# Allegro board AT606IO_VB1.brd
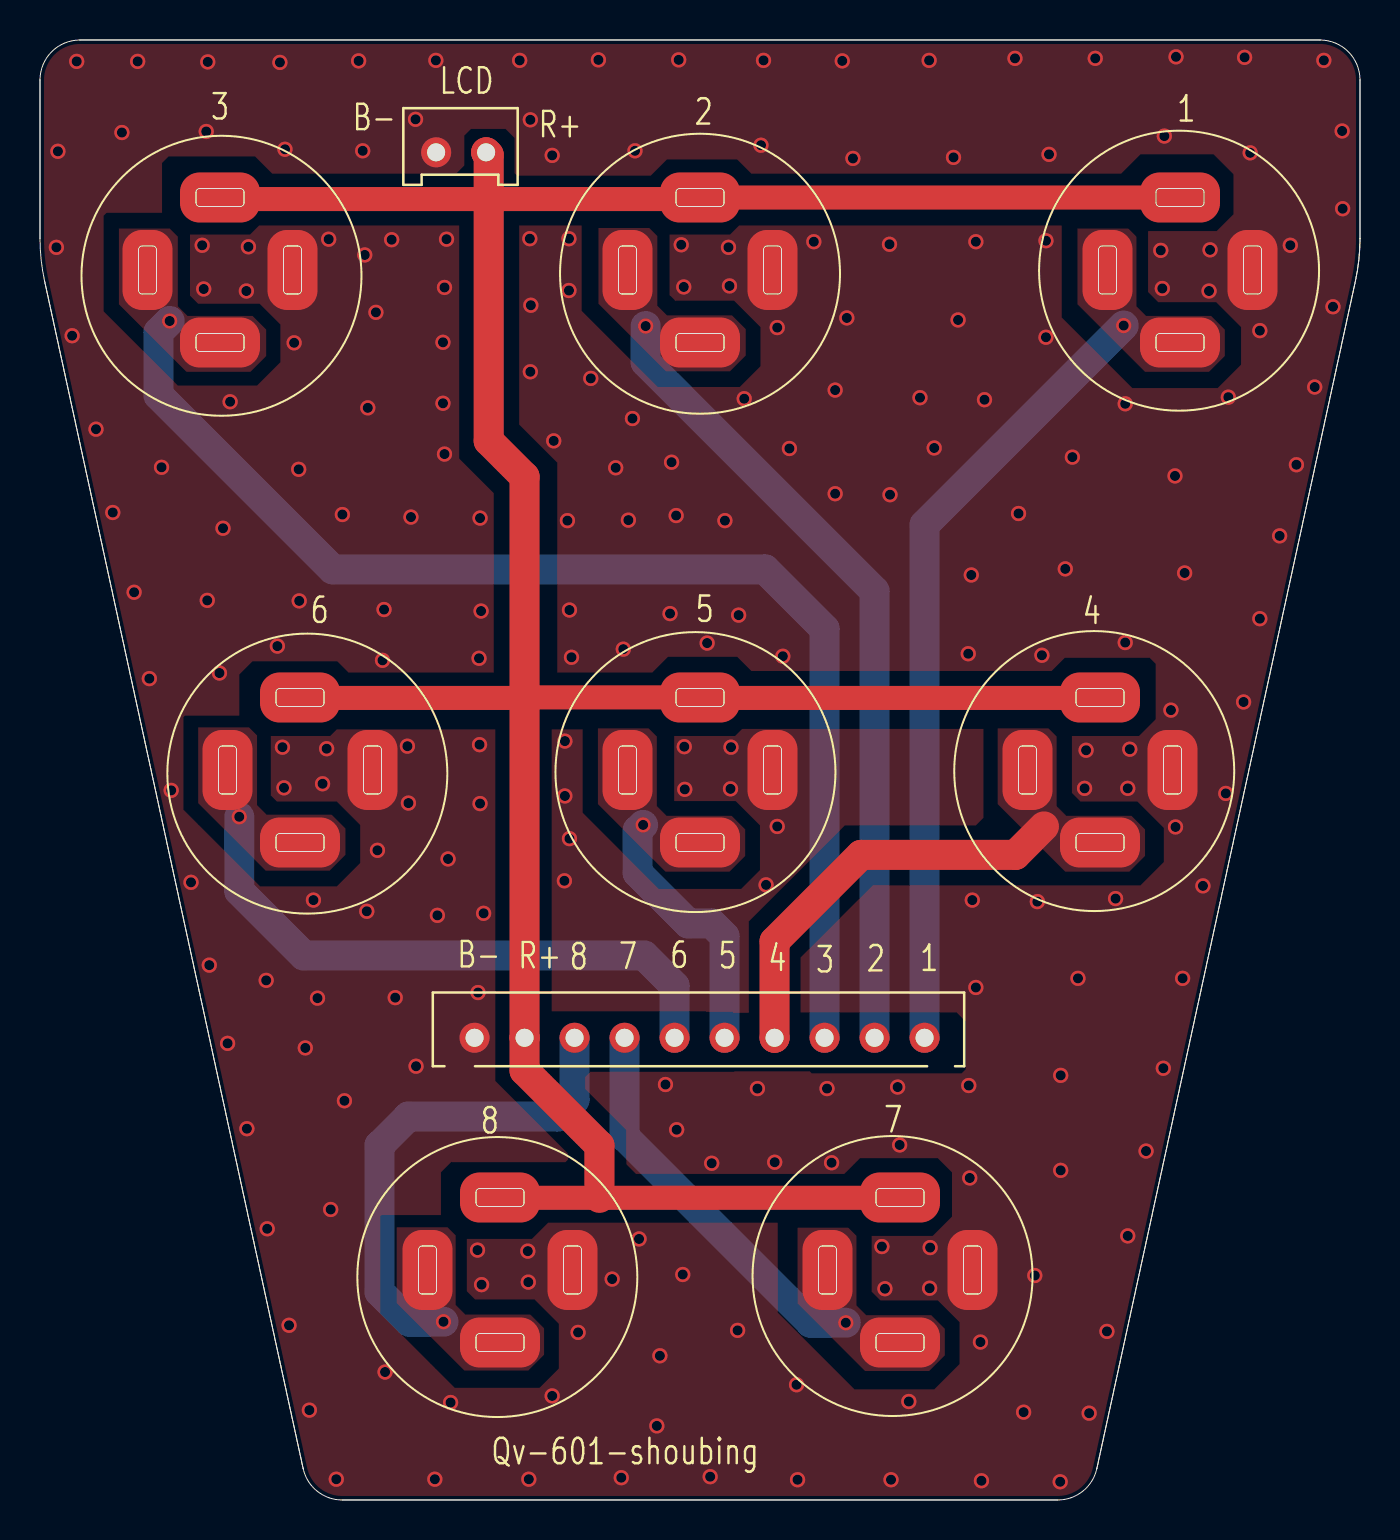
[diagram p0: board, top side]
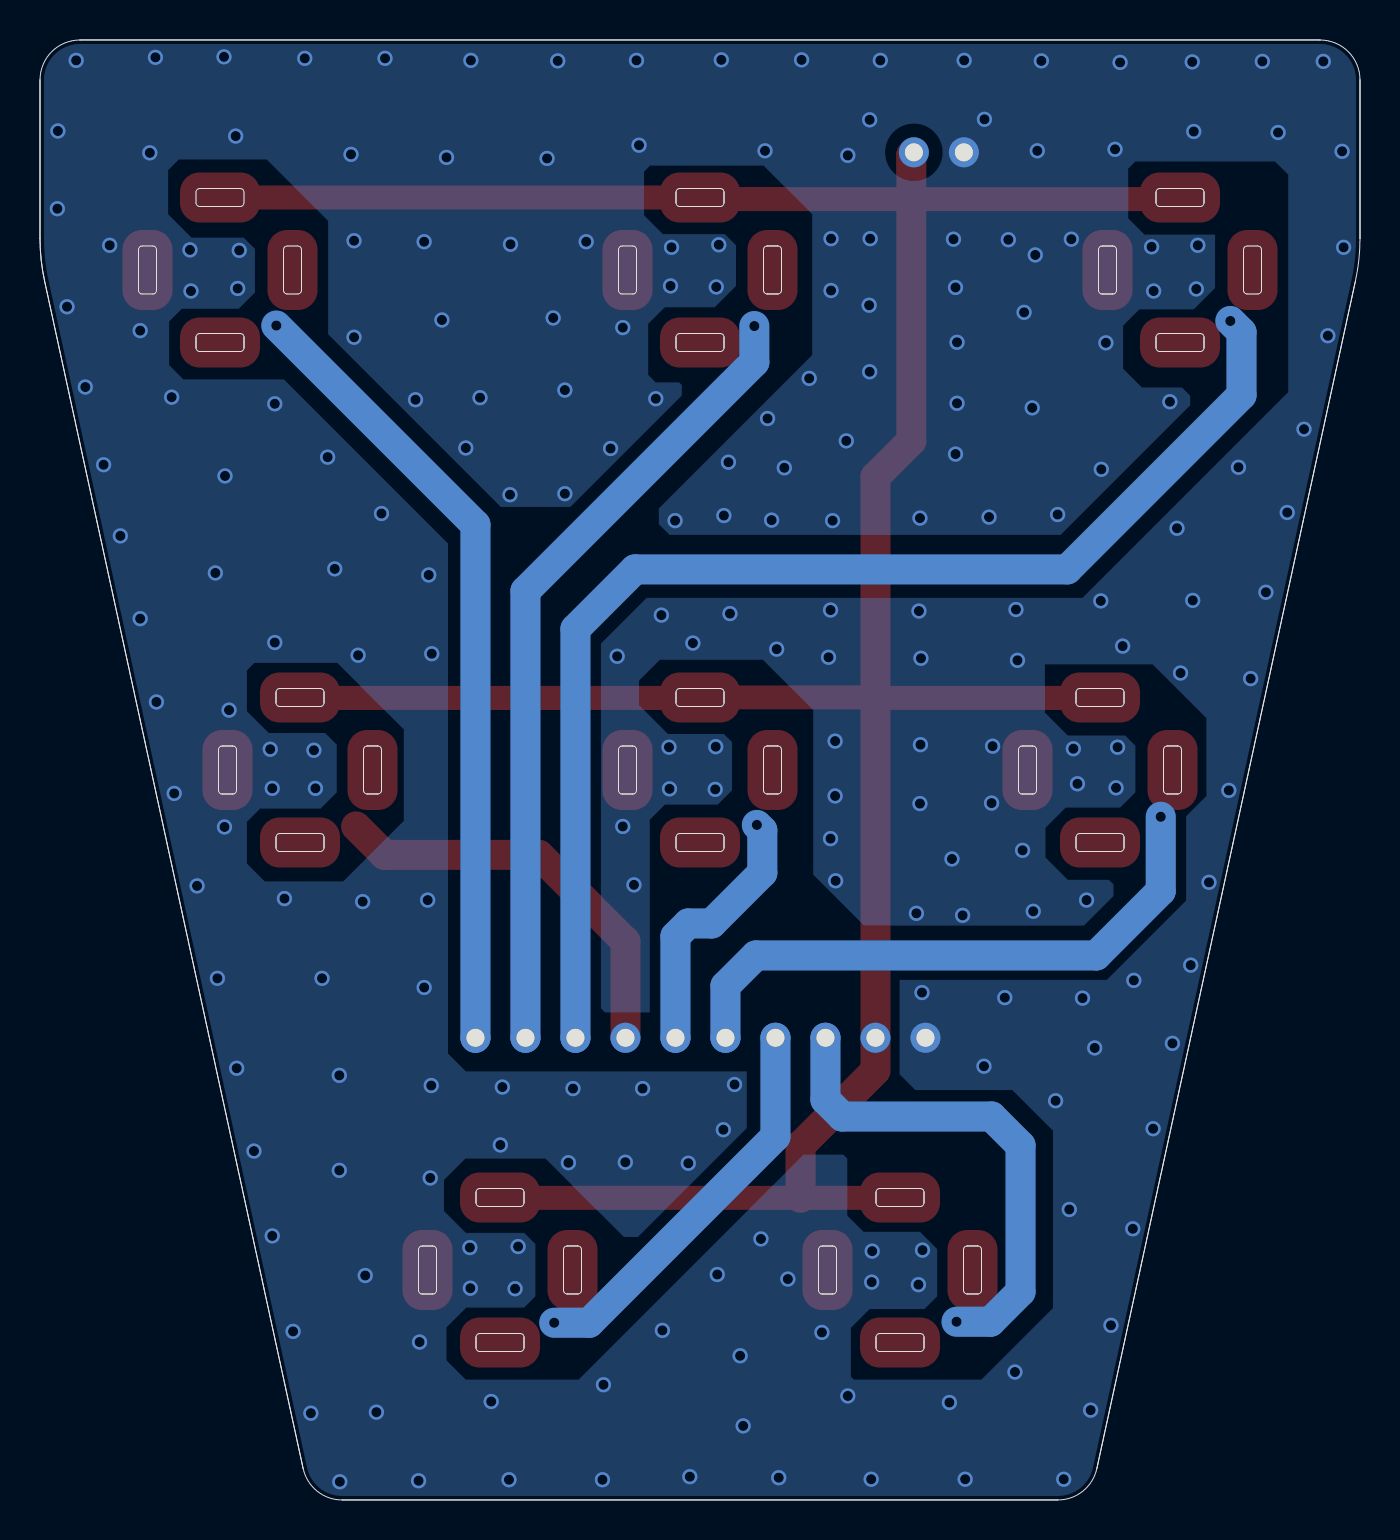
[diagram p1: board, bottom side, seen from below]

Outline 66 x 73 mm; copper layers: TOP, BOTTOM. Coordinates in mm from the lower left corner of the outline.
Outline path: 0,71 0,63.08 ; 0,71 arc(0.59,72.41) 2,73 ; 0,71 0,63.08 ; 0,63.08 arc(0.06,62.01) 0.23,60.95 ; 2,73 64,73 ; 2,73 64,73 ; 0.23,60.95 13.16,1.57 ; 0.23,60.95 13.16,1.57 ; 13.16,1.57 arc(13.86,0.44) 15.11,0 ; 64,73 arc(65.41,72.41) 66,71 ; 7.8,65.39 7.8,64.86 ; 7.8,65.39 arc(7.85,65.52) 7.98,65.58 ; 7.8,65.39 7.8,64.86 ; 7.8,64.86 arc(7.85,64.73) 7.98,64.68 ; 7.98,65.58 10.02,65.58 ; 7.98,65.58 10.02,65.58 ; 7.8,58.14 7.8,57.61 ; 7.8,58.14 arc(7.85,58.27) 7.98,58.33 ; 7.8,58.14 7.8,57.61 ; 7.8,57.61 arc(7.85,57.48) 7.98,57.43 ; 7.98,58.33 10.02,58.33 ; 7.98,58.33 10.02,58.33 ; 10.02,65.58 arc(10.15,65.52) 10.2,65.39 ; 7.98,64.68 10.02,64.68 ; 7.98,64.68 10.02,64.68 ; 10.02,64.68 arc(10.15,64.73) 10.2,64.86 ; 10.02,58.33 arc(10.15,58.27) 10.2,58.14 ; 7.98,57.43 10.02,57.43 ; 7.98,57.43 10.02,57.43 ; 10.02,57.43 arc(10.15,57.48) 10.2,57.61 ; 8.93,37.52 8.93,35.48 ; 8.93,37.52 arc(8.98,37.65) 9.11,37.7 ; 8.93,37.52 8.93,35.48 ; 8.93,35.48 arc(8.98,35.35) 9.11,35.3 ; 9.11,37.7 9.64,37.7 ; 9.11,37.7 9.64,37.7 ; 9.64,37.7 arc(9.77,37.65) 9.83,37.52 ; 9.11,35.3 9.64,35.3 ; 9.11,35.3 9.64,35.3 ; 9.64,35.3 arc(9.77,35.35) 9.83,35.48 ; 9.83,37.52 9.83,35.48 ; 9.83,37.52 9.83,35.48 ; 10.2,65.39 10.2,64.86 ; 10.2,65.39 10.2,64.86 ; 10.2,58.14 10.2,57.61 ; 10.2,58.14 10.2,57.61 ; 11.8,40.39 11.8,39.86 ; 11.8,40.39 arc(11.85,40.52) 11.98,40.58 ; 11.8,40.39 11.8,39.86 ; 11.8,39.86 arc(11.85,39.73) 11.98,39.68 ; 11.98,40.58 14.02,40.58 ; 11.98,40.58 14.02,40.58 ; 11.8,33.14 11.8,32.61 ; 11.8,33.14 arc(11.85,33.27) 11.98,33.33 ; 11.8,33.14 11.8,32.61 ; 11.8,32.61 arc(11.85,32.48) 11.98,32.43 ; 11.98,33.33 14.02,33.33 ; 11.98,33.33 14.02,33.33 ; 14.02,40.58 arc(14.15,40.52) 14.2,40.39 ; 11.98,39.68 14.02,39.68 ; 11.98,39.68 14.02,39.68 ; 14.02,39.68 arc(14.15,39.73) 14.2,39.86 ; 14.02,33.33 arc(14.15,33.27) 14.2,33.14 ; 11.98,32.43 14.02,32.43 ; 11.98,32.43 14.02,32.43 ; 14.02,32.43 arc(14.15,32.48) 14.2,32.61 ; 12.18,62.52 12.18,60.48 ; 12.18,62.52 arc(12.23,62.65) 12.36,62.7 ; 12.18,62.52 12.18,60.48 ; 12.18,60.48 arc(12.23,60.35) 12.36,60.3 ; 12.36,62.7 12.89,62.7 ; 12.36,62.7 12.89,62.7 ; 12.89,62.7 arc(13.02,62.65) 13.08,62.52 ; 12.36,60.3 12.89,60.3 ; 12.36,60.3 12.89,60.3 ; 12.89,60.3 arc(13.02,60.35) 13.08,60.48 ; 13.08,62.52 13.08,60.48 ; 13.08,62.52 13.08,60.48 ; 14.2,40.39 14.2,39.86 ; 14.2,40.39 14.2,39.86 ; 14.2,33.14 14.2,32.61 ; 14.2,33.14 14.2,32.61 ; 15.11,0 50.89,0 ; 15.11,0 50.89,0 ; 50.89,0 arc(52.14,0.44) 52.84,1.57 ; 16.18,37.52 16.18,35.48 ; 16.18,37.52 arc(16.23,37.65) 16.36,37.7 ; 16.18,37.52 16.18,35.48 ; 16.18,35.48 arc(16.23,35.35) 16.36,35.3 ; 16.36,37.7 16.89,37.7 ; 16.36,37.7 16.89,37.7 ; 16.89,37.7 arc(17.02,37.65) 17.08,37.52 ; 16.36,35.3 16.89,35.3 ; 16.36,35.3 16.89,35.3 ; 16.89,35.3 arc(17.02,35.35) 17.08,35.48 ; 17.08,37.52 17.08,35.48 ; 17.08,37.52 17.08,35.48 ; 18.93,12.52 18.93,10.48 ; 18.93,12.52 arc(18.98,12.65) 19.11,12.7 ; 18.93,12.52 18.93,10.48 ; 18.93,10.48 arc(18.98,10.35) 19.11,10.3 ; 19.11,12.7 19.64,12.7 ; 19.11,12.7 19.64,12.7 ; 19.64,12.7 arc(19.77,12.65) 19.83,12.52 ; 19.11,10.3 19.64,10.3 ; 19.11,10.3 19.64,10.3 ; 19.64,10.3 arc(19.77,10.35) 19.83,10.48 ; 19.83,12.52 19.83,10.48 ; 19.83,12.52 19.83,10.48 ; 21.8,15.39 21.8,14.86 ; 21.8,15.39 arc(21.85,15.52) 21.98,15.58 ; 21.8,15.39 21.8,14.86 ; 21.8,14.86 arc(21.85,14.73) 21.98,14.68 ; 21.98,15.58 24.02,15.58 ; 21.98,15.58 24.02,15.58 ; 21.8,8.14 21.8,7.61 ; 21.8,8.14 arc(21.85,8.27) 21.98,8.33 ; 21.8,8.14 21.8,7.61 ; 21.8,7.61 arc(21.85,7.48) 21.98,7.43 ; 21.98,8.33 24.02,8.33 ; 21.98,8.33 24.02,8.33 ; 24.02,15.58 arc(24.15,15.52) 24.2,15.39 ; 21.98,14.68 24.02,14.68 ; 21.98,14.68 24.02,14.68 ; 24.02,14.68 arc(24.15,14.73) 24.2,14.86 ; 24.02,8.33 arc(24.15,8.27) 24.2,8.14 ; 21.98,7.43 24.02,7.43 ; 21.98,7.43 24.02,7.43 ; 24.02,7.43 arc(24.15,7.48) 24.2,7.61 ; 24.2,15.39 24.2,14.86 ; 24.2,15.39 24.2,14.86 ; 24.2,8.14 24.2,7.61 ; 24.2,8.14 24.2,7.61 ; 26.18,12.52 26.18,10.48 ; 26.18,12.52 arc(26.23,12.65) 26.36,12.7 ; 26.18,12.52 26.18,10.48 ; 26.18,10.48 arc(26.23,10.35) 26.36,10.3 ; 26.36,12.7 26.89,12.7 ; 26.36,12.7 26.89,12.7 ; 26.89,12.7 arc(27.02,12.65) 27.08,12.52 ; 26.36,10.3 26.89,10.3 ; 26.36,10.3 26.89,10.3 ; 26.89,10.3 arc(27.02,10.35) 27.08,10.48 ; 27.08,12.52 27.08,10.48 ; 27.08,12.52 27.08,10.48 ; 28.93,62.52 28.93,60.48 ; 28.93,62.52 arc(28.98,62.65) 29.11,62.7 ; 28.93,62.52 28.93,60.48 ; 28.93,60.48 arc(28.98,60.35) 29.11,60.3 ; 29.11,62.7 29.64,62.7 ; 29.11,62.7 29.64,62.7 ; 28.93,37.52 28.93,35.48 ; 28.93,37.52 arc(28.98,37.65) 29.11,37.7 ; 28.93,37.52 28.93,35.48 ; 28.93,35.48 arc(28.98,35.35) 29.11,35.3 ; 29.11,37.7 29.64,37.7 ; 29.11,37.7 29.64,37.7 ; 29.64,62.7 arc(29.77,62.65) 29.83,62.52 ; 29.11,60.3 29.64,60.3 ; 29.11,60.3 29.64,60.3 ; 29.64,60.3 arc(29.77,60.35) 29.83,60.48 ; 29.64,37.7 arc(29.77,37.65) 29.83,37.52 ; 29.11,35.3 29.64,35.3 ; 29.11,35.3 29.64,35.3 ; 29.64,35.3 arc(29.77,35.35) 29.83,35.48 ; 29.83,62.52 29.83,60.48 ; 29.83,62.52 29.83,60.48 ; 29.83,37.52 29.83,35.48 ; 29.83,37.52 29.83,35.48 ; 31.8,65.39 31.8,64.86 ; 31.8,65.39 arc(31.85,65.52) 31.98,65.58 ; 31.8,65.39 31.8,64.86 ; 31.8,64.86 arc(31.85,64.73) 31.98,64.68 ; 31.98,65.58 34.02,65.58 ; 31.98,65.58 34.02,65.58 ; 31.8,58.14 31.8,57.61 ; 31.8,58.14 arc(31.85,58.27) 31.98,58.33 ; 31.8,58.14 31.8,57.61 ; 31.8,57.61 arc(31.85,57.48) 31.98,57.43 ; 31.98,58.33 34.02,58.33 ; 31.98,58.33 34.02,58.33 ; 31.8,40.39 31.8,39.86 ; 31.8,40.39 arc(31.85,40.52) 31.98,40.58 ; 31.8,40.39 31.8,39.86 ; 31.8,39.86 arc(31.85,39.73) 31.98,39.68 ; 31.98,40.58 34.02,40.58 ; 31.98,40.58 34.02,40.58 ; 31.8,33.14 31.8,32.61 ; 31.8,33.14 arc(31.85,33.27) 31.98,33.33 ; 31.8,33.14 31.8,32.61 ; 31.8,32.61 arc(31.85,32.48) 31.98,32.43 ; 31.98,33.33 34.02,33.33 ; 31.98,33.33 34.02,33.33 ; 34.02,65.58 arc(34.15,65.52) 34.2,65.39 ; 31.98,64.68 34.02,64.68 ; 31.98,64.68 34.02,64.68 ; 34.02,64.68 arc(34.15,64.73) 34.2,64.86 ; 34.02,58.33 arc(34.15,58.27) 34.2,58.14 ; 31.98,57.43 34.02,57.43 ; 31.98,57.43 34.02,57.43 ; 34.02,57.43 arc(34.15,57.48) 34.2,57.61 ; 34.02,40.58 arc(34.15,40.52) 34.2,40.39 ; 31.98,39.68 34.02,39.68 ; 31.98,39.68 34.02,39.68 ; 34.02,39.68 arc(34.15,39.73) 34.2,39.86 ; 34.02,33.33 arc(34.15,33.27) 34.2,33.14 ; 31.98,32.43 34.02,32.43 ; 31.98,32.43 34.02,32.43 ; 34.02,32.43 arc(34.15,32.48) 34.2,32.61 ; 34.2,65.39 34.2,64.86 ; 34.2,65.39 34.2,64.86 ; 34.2,58.14 34.2,57.61 ; 34.2,58.14 34.2,57.61 ; 34.2,40.39 34.2,39.86 ; 34.2,40.39 34.2,39.86 ; 34.2,33.14 34.2,32.61 ; 34.2,33.14 34.2,32.61 ; 36.18,37.52 36.18,35.48 ; 36.18,37.52 arc(36.23,37.65) 36.36,37.7 ; 36.18,37.52 36.18,35.48 ; 36.18,35.48 arc(36.23,35.35) 36.36,35.3 ; 36.36,37.7 36.89,37.7 ; 36.36,37.7 36.89,37.7 ; 36.89,37.7 arc(37.02,37.65) 37.08,37.52 ; 36.36,35.3 36.89,35.3 ; 36.36,35.3 36.89,35.3 ; 36.89,35.3 arc(37.02,35.35) 37.08,35.48 ; 37.08,37.52 37.08,35.48 ; 37.08,37.52 37.08,35.48 ; 38.93,12.52 38.93,10.48 ; 38.93,12.52 arc(38.98,12.65) 39.11,12.7 ; 38.93,12.52 38.93,10.48 ; 38.93,10.48 arc(38.98,10.35) 39.11,10.3 ; 39.11,12.7 39.64,12.7 ; 39.11,12.7 39.64,12.7 ; 39.64,12.7 arc(39.77,12.65) 39.83,12.52 ; 39.11,10.3 39.64,10.3 ; 39.11,10.3 39.64,10.3 ; 39.64,10.3 arc(39.77,10.35) 39.83,10.48 ; 39.83,12.52 39.83,10.48 ; 39.83,12.52 39.83,10.48 ; 41.8,15.39 41.8,14.86 ; 41.8,15.39 arc(41.85,15.52) 41.98,15.58 ; 41.8,15.39 41.8,14.86 ; 41.8,14.86 arc(41.85,14.73) 41.98,14.68 ; 41.98,15.58 44.02,15.58 ; 41.98,15.58 44.02,15.58 ; 41.8,8.14 41.8,7.61 ; 41.8,8.14 arc(41.85,8.27) 41.98,8.33 ; 41.8,8.14 41.8,7.61 ; 41.8,7.61 arc(41.85,7.48) 41.98,7.43 ; 41.98,8.33 44.02,8.33 ; 41.98,8.33 44.02,8.33 ; 44.02,15.58 arc(44.15,15.52) 44.2,15.39 ; 41.98,14.68 44.02,14.68 ; 41.98,14.68 44.02,14.68 ; 44.02,14.68 arc(44.15,14.73) 44.2,14.86 ; 44.02,8.33 arc(44.15,8.27) 44.2,8.14 ; 41.98,7.43 44.02,7.43 ; 41.98,7.43 44.02,7.43 ; 44.02,7.43 arc(44.15,7.48) 44.2,7.61 ; 44.2,15.39 44.2,14.86 ; 44.2,15.39 44.2,14.86 ; 44.2,8.14 44.2,7.61 ; 44.2,8.14 44.2,7.61 ; 46.18,12.52 46.18,10.48 ; 46.18,12.52 arc(46.23,12.65) 46.36,12.7 ; 46.18,12.52 46.18,10.48 ; 46.18,10.48 arc(46.23,10.35) 46.36,10.3 ; 46.36,12.7 46.89,12.7 ; 46.36,12.7 46.89,12.7 ; 46.89,12.7 arc(47.02,12.65) 47.08,12.52 ; 46.36,10.3 46.89,10.3 ; 46.36,10.3 46.89,10.3 ; 46.89,10.3 arc(47.02,10.35) 47.08,10.48 ; 47.08,12.52 47.08,10.48 ; 47.08,12.52 47.08,10.48 ; 48.93,37.52 48.93,35.48 ; 48.93,37.52 arc(48.98,37.65) 49.11,37.7 ; 48.93,37.52 48.93,35.48 ; 48.93,35.48 arc(48.98,35.35) 49.11,35.3 ; 49.11,37.7 49.64,37.7 ; 49.11,37.7 49.64,37.7 ; 49.64,37.7 arc(49.77,37.65) 49.83,37.52 ; 49.11,35.3 49.64,35.3 ; 49.11,35.3 49.64,35.3 ; 49.64,35.3 arc(49.77,35.35) 49.83,35.48 ; 49.83,37.52 49.83,35.48 ; 49.83,37.52 49.83,35.48 ; 51.8,40.39 51.8,39.86 ; 51.8,40.39 arc(51.85,40.52) 51.98,40.58 ; 51.8,40.39 51.8,39.86 ; 51.8,39.86 arc(51.85,39.73) 51.98,39.68 ; 51.98,40.58 54.02,40.58 ; 51.98,40.58 54.02,40.58 ; 51.8,33.14 51.8,32.61 ; 51.8,33.14 arc(51.85,33.27) 51.98,33.33 ; 51.8,33.14 51.8,32.61 ; 51.8,32.61 arc(51.85,32.48) 51.98,32.43 ; 51.98,33.33 54.02,33.33 ; 51.98,33.33 54.02,33.33 ; 54.02,40.58 arc(54.15,40.52) 54.2,40.39 ; 51.98,39.68 54.02,39.68 ; 51.98,39.68 54.02,39.68 ; 54.02,39.68 arc(54.15,39.73) 54.2,39.86 ; 54.02,33.33 arc(54.15,33.27) 54.2,33.14 ; 51.98,32.43 54.02,32.43 ; 51.98,32.43 54.02,32.43 ; 54.02,32.43 arc(54.15,32.48) 54.2,32.61 ; 52.84,1.57 65.77,60.95 ; 52.84,1.57 65.77,60.95 ; 65.77,60.95 arc(65.94,62.01) 66,63.08 ; 65.77,60.95 arc(65.94,62.01) 66,63.08 ; 54.2,40.39 54.2,39.86 ; 54.2,40.39 54.2,39.86 ; 54.2,33.14 54.2,32.61 ; 54.2,33.14 54.2,32.61 ; 55.8,58.14 55.8,57.61 ; 55.8,58.14 arc(55.85,58.27) 55.98,58.33 ; 55.8,58.14 55.8,57.61 ; 55.8,57.61 arc(55.85,57.48) 55.98,57.43 ; 55.98,58.33 58.02,58.33 ; 55.98,58.33 58.02,58.33 ; 58.02,58.33 arc(58.15,58.27) 58.2,58.14 ; 55.98,57.43 58.02,57.43 ; 55.98,57.43 58.02,57.43 ; 58.02,57.43 arc(58.15,57.48) 58.2,57.61 ; 56.18,37.52 56.18,35.48 ; 56.18,37.52 arc(56.23,37.65) 56.36,37.7 ; 56.18,37.52 56.18,35.48 ; 56.18,35.48 arc(56.23,35.35) 56.36,35.3 ; 56.36,37.7 56.89,37.7 ; 56.36,37.7 56.89,37.7 ; 56.89,37.7 arc(57.02,37.65) 57.08,37.52 ; 56.36,35.3 56.89,35.3 ; 56.36,35.3 56.89,35.3 ; 56.89,35.3 arc(57.02,35.35) 57.08,35.48 ; 57.08,37.52 57.08,35.48 ; 57.08,37.52 57.08,35.48 ; 58.2,58.14 58.2,57.61 ; 58.2,58.14 58.2,57.61 ; 66,71 66,63.08 ; 66,71 66,63.08 ; 4.93,62.52 arc(4.98,62.65) 5.11,62.7 5.64,62.7 arc(5.77,62.65) 5.83,62.52 5.83,60.48 arc(5.77,60.35) 5.64,60.3 5.11,60.3 arc(4.98,60.35) 4.93,60.48 4.93,62.52 ; 36.18,62.52 arc(36.23,62.65) 36.36,62.7 36.89,62.7 arc(37.02,62.65) 37.08,62.52 37.08,60.48 arc(37.02,60.35) 36.89,60.3 36.36,60.3 arc(36.23,60.35) 36.18,60.48 36.18,62.52 ; 52.93,62.52 arc(52.98,62.65) 53.11,62.7 53.64,62.7 arc(53.77,62.65) 53.83,62.52 53.83,60.48 arc(53.77,60.35) 53.64,60.3 53.11,60.3 arc(52.98,60.35) 52.93,60.48 52.93,62.52 ; 55.8,65.39 arc(55.85,65.52) 55.98,65.58 58.02,65.58 arc(58.15,65.52) 58.2,65.39 58.2,64.86 arc(58.15,64.73) 58.02,64.68 55.98,64.68 arc(55.85,64.73) 55.8,64.86 55.8,65.39 ; 60.18,62.52 arc(60.23,62.65) 60.36,62.7 60.89,62.7 arc(61.02,62.65) 61.08,62.52 61.08,60.48 arc(61.02,60.35) 60.89,60.3 60.36,60.3 arc(60.23,60.35) 60.18,60.48 60.18,62.52

## Placement (name value [footprint] x y rotation side)
J15  ZX-XH2.54-2PZZ  [XH2R54-21]  22.31 67.38 180 top
U2  ZX-XH2.54-10PZZ  [XH2R54-10P1]  44.23 23.11 180 top

## Library data of the parts
J15 = CON2
U2 = CON10

## Footprints (pads in the part's own frame, mm; a bottom-side part is the same pattern mirrored in y, then rotated)
XH2R54-10P1
  round 1.5 hole 0.9: 1(0,0) 2(2.5,0) 3(5,0) 4(7.5,0) 5(10,0) 6(12.5,0) 7(15,0) 8(17.5,0) 9(20,0) 10(22.5,0)
XH2R54-21
  round 1.5 hole 0.9: 1(0,0) 2(2.5,0)

## Nets
GND: J15.2 U2.10
1: U2.1
2: U2.2
3: U2.3
4: U2.4
5: U2.5
6: U2.6
7: U2.7
8: U2.8
V+: J15.1 U2.9

## Via types
v1: diameter 0.762, hole 0.508, TOP to BOTTOM, 245 vias

## Routing (per net, layer and track width the routed paths; a pad name or vN(x,y) marks a point on that pad's centre or on a via; arc(x,y) is an arc through that point)
GND:
  vias: v1(0.9,67.43) v1(0.82,62.63) v1(1.61,58.21) v1(1.84,71.93) v1(2.8,53.54) v1(3.64,49.37) v1(4.1,68.37) v1(4.71,45.39) v1(4.88,71.93) v1(5.47,41.07) v1(6.08,51.64) v1(6.56,35.48) v1(7.55,30.88) v1(8.11,62.74) v1(8.19,60.55) v1(8.39,71.9) v1(8.31,68.42) v1(8.36,44.98) v1(8.46,26.74) v1(8.97,41.35) v1(9.15,48.59) v1(9.38,22.83) v1(9.51,54.91) v1(10.32,60.45) v1(10.34,18.56) v1(10.42,62.66) v1(11.31,25.98) v1(11.36,13.56) v1(11.87,42.69) v1(12,71.88) v1(12.12,37.64) v1(12.2,35.61) v1(12.25,67.54) v1(12.45,8.73) v1(12.71,57.86) v1(12.93,51.53) v1(12.96,44.96) v1(13.27,22.6) v1(13.47,4.49) v1(13.67,29.99) v1(13.87,25.09) v1(14.13,35.81) v1(14.33,37.56) v1(14.43,63.04) v1(14.54,14.53) v1(14.81,1.04) v1(15.12,49.27) v1(15.22,19.96) v1(15.93,71.96) v1(16.14,67.46) v1(16.24,62.25) v1(16.39,54.61) v1(16.34,29.44) v1(16.8,59.38) v1(16.87,32.48) v1(17.2,44.52) v1(17.13,41.98) v1(17.25,6.4) v1(17.58,63.01) v1(17.76,25.12) v1(18.37,37.69) v1(18.42,34.85) v1(18.55,49.15) v1(18.78,69.03) v1(18.8,21.69) v1(19.79,71.98) v1(19.74,1.04) v1(19.87,29.23) v1(20.15,57.88) v1(20.15,54.84) v1(20.22,60.63) v1(20.22,52.3) v1(20.33,63.04) v1(20.4,32.05) v1(20.53,4.87) v1(21.9,25.37) v1(21.88,12.49) v1(22,49.1) v1(21.95,42.08) v1(21.98,37.77) v1(22,34.82) v1(22.05,44.45) v1(22.08,10.77) v1(22.18,29.33) v1(23.98,71.98) v1(24.39,12.44) v1(24.49,63.07) v1(24.42,10.89) v1(24.44,1.04) v1(24.52,69.01) v1(24.54,59.74) v1(24.52,56.41) v1(25.61,67.23) v1(25.61,5.2) v1(25.69,52.96) v1(26.24,37.94) v1(26.24,35.2) v1(26.22,30.96) v1(26.37,48.97) v1(26.45,63.07) v1(26.45,60.47) v1(26.47,44.5) v1(26.47,33.07) v1(26.57,42.14) v1(26.9,8.38) v1(27.54,56.08) v1(27.92,72.01) v1(28.61,11.05) v1(28.78,51.61) v1(29.06,1.11) v1(29.17,42.54) v1(29.42,48.99) v1(29.62,54.07) v1(29.75,67.46) v1(29.95,13.05) v1(30.84,3.71) v1(30.99,7.21) v1(31.27,20.77) v1(31.5,44.32) v1(31.58,51.89) v1(31.81,49.22) v1(31.83,18.51) v1(31.93,72.01) v1(32.06,62.76) v1(32.19,60.65) v1(32.14,11.27) v1(32.21,37.67) v1(32.24,35.53) v1(33.36,42.85) v1(33.51,1.17) v1(33.59,16.84) v1(34.25,48.97) v1(34.42,62.63) v1(34.47,60.7) v1(34.55,37.64) v1(34.53,35.56) v1(34.88,8.48) v1(34.93,44.24) v1(35.21,55.06) v1(35.87,20.57) v1(36.05,67.74) v1(36.18,71.98) v1(36.3,30.76) v1(36.73,16.89) v1(36.86,58.62) v1(36.86,33.68) v1(37.14,42.19) v1(37.47,52.58) v1(37.83,5.76) v1(37.88,1.01) v1(38.69,62.91) v1(39.35,20.57) v1(39.58,16.86) v1(39.76,55.5) v1(39.76,50.31) v1(40.11,71.96) v1(40.34,59.1) v1(40.65,67.08) v1(42.09,12.67) v1(42.25,10.56) v1(42.48,62.79) v1(42.5,50.26) v1(42.55,1.01) v1(42.88,20.65) v1(42.98,17.75) v1(43.44,4.92) v1(44,55.12) v1(44.46,71.98) v1(44.51,12.62) v1(44.48,10.59) v1(44.71,52.6) v1(45.68,67.13) v1(45.9,59) v1(46.41,42.31) v1(46.44,20.72) v1(46.49,16.1) v1(46.56,46.25) v1(46.62,29.99) v1(46.79,62.91) v1(46.79,25.63) v1(47.02,7.9) v1(47.07,0.96) v1(47.23,55.01) v1(48.75,72.08) v1(48.93,49.32) v1(49.18,4.39) v1(49.74,11.22) v1(49.87,29.92) v1(50.1,42.24) v1(50.3,62.96) v1(50.3,58.14) v1(50.45,67.28) v1(51.01,0.91) v1(51.03,21.23) v1(51.03,16.48) v1(51.26,46.56) v1(51.62,52.14) v1(51.9,26.08) v1(52.31,37.49) v1(52.23,35.58) v1(52.46,4.34) v1(52.76,72.08) v1(53.35,8.43) v1(53.78,30.07) v1(54.26,54.81) v1(54.26,42.87) v1(54.39,35.58) v1(54.39,13.21) v1(54.49,37.54) v1(55.3,17.45) v1(56.04,62.48) v1(56.12,60.58) v1(56.17,21.59) v1(56.22,68.2) v1(56.55,39.49) v1(56.8,72.16) v1(56.75,51.2) v1(56.78,33.65) v1(57.13,26.08) v1(57.23,46.35) v1(58.15,30.71) v1(58.5,62.51) v1(58.45,60.45) v1(59.29,35.33) v1(59.42,55.14) v1(60.18,39.9) v1(60.23,72.13) v1(60.51,67.36) v1(60.99,58.47) v1(60.99,44.07) v1(61.98,48.21) v1(62.52,62.74) v1(62.82,51.76) v1(63.73,55.65) v1(64.19,71.98) v1(64.65,59.66) v1(65.11,68.45) v1(65.13,64.56)
1: length 39.7
  BOTTOM w1.5: U2.1 44.23,48.77 v1(54.18,58.72)
2: length 40.3
  BOTTOM w1.5: U2.2 41.73,45.45 30.28,56.89 v1(30.28,58.7)
3: length 62.5
  BOTTOM w1.5: v1(6.48,58.95) 5.92,58.39 5.92,55.24 14.64,46.53 36.25,46.53 39.23,43.55 U2.3
4: length 20.7
  TOP w1.5: U2.4 36.73,27.93 41.05,32.26 48.77,32.26 50.2,33.68
5: length 13.2
  BOTTOM w1.5: U2.5 34.23,28.18 33.59,28.83 32.42,28.83 29.88,31.36 29.88,33.48 v1(30.16,33.75)
6: length 30
  BOTTOM w1.5: U2.6 31.73,25.71 30.21,27.23 13.19,27.23 9.96,30.45 v1(9.96,34.16)
7: length 19.9
  BOTTOM w1.5: U2.7 29.23,18.17 38.54,8.86 v1(40.29,8.86)
8: length 24.9
  BOTTOM w1.5: U2.8 26.73,20.01 25.89,19.17 18.42,19.17 16.97,17.73 16.97,10.41 18.47,8.91 v1(20.17,8.91)
V+: length 144.7
  TOP w1.2: 41.15,15.11 24.85,15.11 ; 31.3,65.05 22.46,65.05 22.43,65.07 22.41,65.05 10.78,65.05 ; 14.79,40.1 24.2,40.1 24.23,40.08 24.28,40.13 31.2,40.13 ; 34.96,40.1 51.19,40.1 ; 55.3,65.12 34.73,65.12
  TOP w1.5: 27.97,15.11 27.97,17.73 24.23,21.47 U2.9 24.23,51.16 22.43,52.96 22.43,67.26 J15.1

## Copper pours and planes (outline as drawn; the poured copper is in the pictures)
GND on TOP: 64,72.8 65.27,72.27 65.8,71 65.8,63.08 65.74,62.03 65.58,60.99 52.65,1.62 52.02,0.6 50.89,0.2 15.11,0.2 13.98,0.6 13.35,1.62 0.42,60.99 0.26,62.03 0.2,63.08 0.2,71 0.73,72.27 2,72.8 ; 1 cut-out
GND on BOTTOM: 64,72.8 65.27,72.27 65.8,71 65.8,63.08 65.74,62.03 65.58,60.99 52.65,1.62 52.02,0.6 50.89,0.2 15.11,0.2 13.98,0.6 13.35,1.62 0.42,60.99 0.26,62.03 0.2,63.08 0.2,71 0.73,72.27 2,72.8 ; 3 cut-outs
1 on TOP: 51.87,63.57 54.41,63.57 54.82,63.17 54.82,59.69 55.3,59.2 58.55,59.2 59.24,58.52 59.24,57.2 58.45,56.41 55.25,56.41 51.87,59.79
2 on TOP: 27.92,63.6 30.46,63.6 30.87,63.19 30.87,59.71 31.35,59.23 34.6,59.23 35.29,58.54 35.29,57.22 34.5,56.44 31.3,56.44 27.92,59.81
3 on TOP: 3.94,63.57 6.48,63.57 6.89,63.17 6.89,59.69 7.37,59.2 10.62,59.2 11.31,58.52 11.31,57.2 10.52,56.41 7.32,56.41 3.94,59.79
4 on TOP: 47.89,38.58 50.43,38.58 50.83,38.17 50.83,34.69 51.31,34.21 54.57,34.21 55.25,33.53 55.25,32.2 54.46,31.42 51.26,31.42 47.89,34.8
5 on TOP: 27.9,38.58 30.44,38.58 30.84,38.17 30.84,34.69 31.32,34.21 34.58,34.21 35.26,33.53 35.26,32.2 34.47,31.42 31.27,31.42 27.9,34.8
6 on TOP: 7.91,38.63 10.45,38.63 10.85,38.22 10.85,34.74 11.33,34.26 14.59,34.26 15.27,33.58 15.27,32.26 14.48,31.47 11.28,31.47 7.91,34.85
7 on TOP: 37.88,13.61 40.42,13.61 40.82,13.21 40.82,9.73 41.31,9.24 44.56,9.24 45.24,8.56 45.24,7.24 44.46,6.45 41.26,6.45 37.88,9.83
8 on TOP: 17.84,13.64 20.38,13.64 20.78,13.23 20.78,9.75 21.27,9.27 24.52,9.27 25.2,8.58 25.2,7.26 24.42,6.47 21.22,6.47 17.84,9.85
GND on TOP (solid shape): 12.89,63.5 13.59,63.21 13.88,62.52 13.88,60.48 13.59,59.79 12.89,59.5 12.36,59.5 11.66,59.79 11.38,60.48 11.38,62.52 11.66,63.21 12.36,63.5
GND on TOP (solid shape): 16.89,38.5 17.59,38.21 17.88,37.52 17.88,35.48 17.59,34.79 16.89,34.5 16.36,34.5 15.66,34.79 15.38,35.48 15.38,37.52 15.66,38.21 16.36,38.5
GND on TOP (solid shape): 26.89,13.5 27.59,13.21 27.88,12.52 27.88,10.48 27.59,9.79 26.89,9.5 26.36,9.5 25.66,9.79 25.38,10.48 25.38,12.52 25.66,13.21 26.36,13.5
GND on TOP (solid shape): 36.89,63.5 37.59,63.21 37.88,62.52 37.88,60.48 37.59,59.79 36.89,59.5 36.36,59.5 35.66,59.79 35.38,60.48 35.38,62.52 35.66,63.21 36.36,63.5
GND on TOP (solid shape): 36.89,38.5 37.59,38.21 37.88,37.52 37.88,35.48 37.59,34.79 36.89,34.5 36.36,34.5 35.66,34.79 35.38,35.48 35.38,37.52 35.66,38.21 36.36,38.5
GND on TOP (solid shape): 46.89,13.5 47.59,13.21 47.88,12.52 47.88,10.48 47.59,9.79 46.89,9.5 46.36,9.5 45.66,9.79 45.38,10.48 45.38,12.52 45.66,13.21 46.36,13.5
GND on TOP (solid shape): 56.89,38.5 57.59,38.21 57.88,37.52 57.88,35.48 57.59,34.79 56.89,34.5 56.36,34.5 55.66,34.79 55.38,35.48 55.38,37.52 55.66,38.21 56.36,38.5
GND on TOP (solid shape): 60.89,63.5 61.59,63.21 61.88,62.52 61.88,60.48 61.59,59.79 60.89,59.5 60.36,59.5 59.66,59.79 59.38,60.48 59.38,62.52 59.66,63.21 60.36,63.5
1 on TOP (solid shape): 53.64,63.5 54.34,63.21 54.63,62.52 54.63,60.48 54.34,59.79 53.64,59.5 53.11,59.5 52.41,59.79 52.13,60.48 52.13,62.52 52.41,63.21 53.11,63.5
1 on TOP (solid shape): 58.02,59.13 58.71,58.84 59,58.14 59,57.61 58.71,56.91 58.02,56.63 55.98,56.63 55.29,56.91 55,57.61 55,58.14 55.29,58.84 55.98,59.13
2 on TOP (solid shape): 29.64,63.5 30.34,63.21 30.63,62.52 30.63,60.48 30.34,59.79 29.64,59.5 29.11,59.5 28.41,59.79 28.13,60.48 28.13,62.52 28.41,63.21 29.11,63.5
2 on TOP (solid shape): 34.02,59.13 34.71,58.84 35,58.14 35,57.61 34.71,56.91 34.02,56.63 31.98,56.63 31.29,56.91 31,57.61 31,58.14 31.29,58.84 31.98,59.13
3 on TOP (solid shape): 5.64,63.5 6.34,63.21 6.63,62.52 6.63,60.48 6.34,59.79 5.64,59.5 5.11,59.5 4.41,59.79 4.13,60.48 4.13,62.52 4.41,63.21 5.11,63.5
3 on TOP (solid shape): 10.02,59.13 10.71,58.84 11,58.14 11,57.61 10.71,56.91 10.02,56.63 7.98,56.63 7.29,56.91 7,57.61 7,58.14 7.29,58.84 7.98,59.13
4 on TOP (solid shape): 49.64,38.5 50.34,38.21 50.63,37.52 50.63,35.48 50.34,34.79 49.64,34.5 49.11,34.5 48.41,34.79 48.13,35.48 48.13,37.52 48.41,38.21 49.11,38.5
4 on TOP (solid shape): 54.02,34.13 54.71,33.84 55,33.14 55,32.61 54.71,31.91 54.02,31.63 51.98,31.63 51.29,31.91 51,32.61 51,33.14 51.29,33.84 51.98,34.13
5 on TOP (solid shape): 29.64,38.5 30.34,38.21 30.63,37.52 30.63,35.48 30.34,34.79 29.64,34.5 29.11,34.5 28.41,34.79 28.13,35.48 28.13,37.52 28.41,38.21 29.11,38.5
5 on TOP (solid shape): 34.02,34.13 34.71,33.84 35,33.14 35,32.61 34.71,31.91 34.02,31.63 31.98,31.63 31.29,31.91 31,32.61 31,33.14 31.29,33.84 31.98,34.13
6 on TOP (solid shape): 9.64,38.5 10.34,38.21 10.63,37.52 10.63,35.48 10.34,34.79 9.64,34.5 9.11,34.5 8.41,34.79 8.13,35.48 8.13,37.52 8.41,38.21 9.11,38.5
6 on TOP (solid shape): 14.02,34.13 14.71,33.84 15,33.14 15,32.61 14.71,31.91 14.02,31.63 11.98,31.63 11.29,31.91 11,32.61 11,33.14 11.29,33.84 11.98,34.13
7 on TOP (solid shape): 39.64,13.5 40.34,13.21 40.63,12.52 40.63,10.48 40.34,9.79 39.64,9.5 39.11,9.5 38.41,9.79 38.13,10.48 38.13,12.52 38.41,13.21 39.11,13.5
7 on TOP (solid shape): 44.02,9.13 44.71,8.84 45,8.14 45,7.61 44.71,6.91 44.02,6.63 41.98,6.63 41.29,6.91 41,7.61 41,8.14 41.29,8.84 41.98,9.13
8 on TOP (solid shape): 19.64,13.5 20.34,13.21 20.63,12.52 20.63,10.48 20.34,9.79 19.64,9.5 19.11,9.5 18.41,9.79 18.13,10.48 18.13,12.52 18.41,13.21 19.11,13.5
8 on TOP (solid shape): 24.02,9.13 24.71,8.84 25,8.14 25,7.61 24.71,6.91 24.02,6.63 21.98,6.63 21.29,6.91 21,7.61 21,8.14 21.29,8.84 21.98,9.13
V+ on TOP (solid shape): 10.02,66.38 10.71,66.09 11,65.39 11,64.86 10.71,64.16 10.02,63.88 7.98,63.88 7.29,64.16 7,64.86 7,65.39 7.29,66.09 7.98,66.38
V+ on TOP (solid shape): 14.02,41.38 14.71,41.09 15,40.39 15,39.86 14.71,39.16 14.02,38.88 11.98,38.88 11.29,39.16 11,39.86 11,40.39 11.29,41.09 11.98,41.38
V+ on TOP (solid shape): 24.02,16.38 24.71,16.09 25,15.39 25,14.86 24.71,14.16 24.02,13.88 21.98,13.88 21.29,14.16 21,14.86 21,15.39 21.29,16.09 21.98,16.38
V+ on TOP (solid shape): 34.02,66.38 34.71,66.09 35,65.39 35,64.86 34.71,64.16 34.02,63.88 31.98,63.88 31.29,64.16 31,64.86 31,65.39 31.29,66.09 31.98,66.38
V+ on TOP (solid shape): 34.02,41.38 34.71,41.09 35,40.39 35,39.86 34.71,39.16 34.02,38.88 31.98,38.88 31.29,39.16 31,39.86 31,40.39 31.29,41.09 31.98,41.38
V+ on TOP (solid shape): 44.02,16.38 44.71,16.09 45,15.39 45,14.86 44.71,14.16 44.02,13.88 41.98,13.88 41.29,14.16 41,14.86 41,15.39 41.29,16.09 41.98,16.38
V+ on TOP (solid shape): 54.02,41.38 54.71,41.09 55,40.39 55,39.86 54.71,39.16 54.02,38.88 51.98,38.88 51.29,39.16 51,39.86 51,40.39 51.29,41.09 51.98,41.38
V+ on TOP (solid shape): 58.02,66.38 58.71,66.09 59,65.39 59,64.86 58.71,64.16 58.02,63.88 55.98,63.88 55.29,64.16 55,64.86 55,65.39 55.29,66.09 55.98,66.38

## Text on the board
Ref Des/Silkscreen Top: 3 | 6 | B- | LCD | 8 | Qv-601-shoubing | R+ | 7 | 2 | 5 | 4 | 1
User.12: FIGURE | SIZE | 0.508 | 0.9 | DRILL CHART: TOP to BOTTOM | ALL UNITS ARE IN MILLIMETERS | PLATED | QTY | 245 | 12
